# EAGLE board CT_schematic (EAGLE 7.6.0)

Size 100 x 80 mm. Coordinates in mm from the lower left corner, seen from the top.
Outline: 0,0 100,0 100,80 0,80 0,0
Copper layers (1*16): Top 0.035mm / dielectric 1.5mm / Bottom 0.035mm
Design rules "default": minimum track width 10mil, minimum drill 24mil, track to track 8mil, track to pad 8mil, pad to pad 8mil, via to via 8mil, smd to smd 8mil, copper to edge 40mil, drill to drill 8mil, minimum pad ring 10mil, minimum via ring 8mil, stop-mask expansion 4mil, vias tented up to drill 0mil, thermal gap 10mil

## Footprints (pad centres in the part's own frame; a part is rotated, then mirrored left to right if it is on the bottom)
C0603 = smd 0.8 x 0.8: 1 -0.762,0; 2 0.762,0
C0402 = smd 0.5 x 0.5: 1 -0.508,0; 2 0.508,0
C1210 = smd 1.2 x 2.5: 1 -1.524,0; 2 1.524,0
R0603 = smd 0.8 x 0.8: 1 -0.762,0; 2 0.762,0
EXV-9H = smd 3.505 x 1.676: 1 -2.857,0; 2 2.857,0
L0603 = smd 0.8 x 0.8: 1 -0.762,0; 2 0.762,0
IND25X25CZ = smd 2.489 x 3.429: 1 -2.718,0; 2 2.718,0
PJ-037B_PACKAGE = drill 3.7 square: 1 12,0 | drill 3.2 square: 2 6,0
LQFP64 = smd 0.3 x 1.2: 1 -3.75,-5.75; 2 -3.25,-5.75; 3 -2.75,-5.75; 4 -2.25,-5.75; 5 -1.75,-5.75; 6 -1.25,-5.75; 7 -0.75,-5.75; 8 -0.25,-5.75; 9 0.25,-5.75; 10 0.75,-5.75; 11 1.25,-5.75; 12 1.75,-5.75; 13 2.25,-5.75; 14 2.75,-5.75; 15 3.25,-5.75; 16 3.75,-5.75; 33 3.75,5.75; 34 3.25,5.75; 35 2.75,5.75; 36 2.25,5.75; 37 1.75,5.75; 38 1.25,5.75; 39 0.75,5.75; 40 0.25,5.75; 41 -0.25,5.75; 42 -0.75,5.75; 43 -1.25,5.75; 44 -1.75,5.75; 45 -2.25,5.75; 46 -2.75,5.75; 47 -3.25,5.75; 48 -3.75,5.75 | smd 1.2 x 0.3: 17 5.75,-3.75; 18 5.75,-3.25; 19 5.75,-2.75; 20 5.75,-2.25; 21 5.75,-1.75; 22 5.75,-1.25; 23 5.75,-0.75; 24 5.75,-0.25; 25 5.75,0.25; 26 5.75,0.75; 27 5.75,1.25; 28 5.75,1.75; 29 5.75,2.25; 30 5.75,2.75; 31 5.75,3.25; 32 5.75,3.75; 49 -5.75,3.75; 50 -5.75,3.25; 51 -5.75,2.75; 52 -5.75,2.25; 53 -5.75,1.75; 54 -5.75,1.25; 55 -5.75,0.75; 56 -5.75,0.25; 57 -5.75,-0.25; 58 -5.75,-0.75; 59 -5.75,-1.25; 60 -5.75,-1.75; 61 -5.75,-2.25; 62 -5.75,-2.75; 63 -5.75,-3.25; 64 -5.75,-3.75
SOIC-8 = smd 1.6 x 0.6: 1 -2.7,1.905 | smd 1.55 x 0.6: 2 -2.7,0.635; 3 -2.7,-0.635; 4 -2.7,-1.905; 5 2.7,-1.905; 6 2.7,-0.635; 7 2.7,0.635; 8 2.7,1.905
TST-110-05-T-D-RA = drill 1 pad 1.7 square: 1 0,0 | drill 1 pad 1.7: 2 0,2.54; 3 2.54,0; 4 2.54,2.54; 5 5.08,0; 6 5.08,2.54; 7 7.62,0; 8 7.62,2.54; 9 10.16,0; 10 10.16,2.54; 11 12.7,0; 12 12.7,2.54; 13 15.24,0; 14 15.24,2.54; 15 17.78,0; 16 17.78,2.54; 17 20.32,0; 18 20.32,2.54; 19 22.86,0; 20 22.86,2.54
RFM75-S = smd 0.85 x 1.6: 1 1.7,0.8; 2 2.97,0.8; 3 4.24,0.8; 4 5.51,0.8; 5 6.78,0.8; 6 8.05,0.8; 7 9.32,0.8; 8 10.59,0.8
ABS07-32.768KHZ-7-T = smd 1.1 x 2.4: 1 -2.5,0; 2 0,0
ASFL1 = smd 1.7 x 1.5: 1 -1.27,-1.1; 2 1.27,-1.1; 3 1.27,1.1; 4 -1.27,1.1
IR3899MTR1PBF = smd 0.25 x 0.75: 1 0,0; 2 0.5,0; 3 1,0; 4 1.5,0; 5 2,0; 6 2.5,0; 7 3,0 | smd 0.75 x 0.25: 8 3.425,0.78; 9 3.425,1.28; 10 3.425,1.78; 14 -0.425,1.78; 15 -0.425,1.28; 16 -0.425,0.78 | smd 0.3 x 1.95: 11 3.22,3.63 | smd 1.62 x 2.42: 12 1.786,3.8 | smd 1 x 1.95: 13 0.117,3.63 | smd 2.19 x 1.25: 17 1.51,1.26
SON-6 = smd 0.55 x 0.3: 1 -0.355,0.5 | smd 0.52 x 0.3: 2 -0.37,0; 3 -0.37,-0.5; 4 0.37,-0.5; 5 0.37,0; 6 0.37,0.5
SW_4-1437565-2 = smd 1.4 x 2.1: 1 -2.23,4.55; 2 -2.23,-4.55; 3 2.23,4.55; 4 2.23,-4.55
LGM67K-G1J2-24-Z = smd 0.8 x 1.4: A -2,0; C 0,0
NC7SZ125M5X = smd 1.3 x 0.7: 1 -1.3,0.95; 2 -1.3,0; 3 -1.3,-0.95; 4 1.3,-0.95; 5 1.3,0.95

## Placement (x,y rotation side)
C1  1e-06  [C0603]  -19.05,72.39 0 top  (outside the outline)
C2  1e-07  [C0603]  -22.86,72.39 0 top  (outside the outline)
C3  1e-07  [C0603]  -26.67,72.39 0 top  (outside the outline)
C4  1e-07  [C0603]  -30.48,72.39 0 top  (outside the outline)
C5  1e-07  [C0603]  -34.29,72.39 0 top  (outside the outline)
C6  1e-07  [C0603]  -38.1,72.39 0 top  (outside the outline)
C7  4.7e-06  [C0603]  -69.85,67.31 0 top  (outside the outline)
C8  1e-08  [C0603]  -41.91,72.39 0 top  (outside the outline)
C9  1e-06  [C0603]  -45.72,72.39 0 top  (outside the outline)
C10  1e-11  [C0402]  -19.05,77.47 0 top  (outside the outline)
C11  1e-11  [C0402]  -22.86,77.47 0 top  (outside the outline)
C12  1e-08  [C0402]  -26.67,77.47 0 top  (outside the outline)
C13  1e-07  [C0402]  -30.48,77.47 0 top  (outside the outline)
C14  1e-07  [C0402]  -34.29,77.47 0 top  (outside the outline)
C15  1e-07  [C0402]  -38.1,77.47 0 top  (outside the outline)
C16  1e-06  [C0603]  -49.53,72.39 0 top  (outside the outline)
C17  1e-08  [C0402]  -41.91,77.47 0 top  (outside the outline)
C18  0.0001  [C1210]  -29.21,55.88 0 top  (outside the outline)
C19  2.2e-06  [C0603]  -15.24,72.39 0 top  (outside the outline)
C20  1e-07  [C0402]  -45.72,77.47 0 top  (outside the outline)
C21  1e-07  [C0402]  -49.53,77.47 0 top  (outside the outline)
C22  8.6971073877236e-09  [R0603]  -52.07,54.61 0 top  (outside the outline)
C23  2.9649229730876e-07  [R0603]  -62.23,54.61 0 top  (outside the outline)
C26  1e-07  [C0402]  -53.34,77.47 0 top  (outside the outline)
C27  0.0001  [EXV-9H]  -17.78,48.26 0 top  (outside the outline)
C28  0.0001  [EXV-9H]  -29.21,48.26 0 top  (outside the outline)
C29  1e-08  [C0402]  -57.15,77.47 0 top  (outside the outline)
C30  1e-08  [C0402]  -60.96,77.47 0 top  (outside the outline)
F1  240.0  [L0603]  -53.34,72.39 0 top  (outside the outline)
I1  6.8e-07  [IND25X25CZ]  -39.37,48.26 0 top  (outside the outline)
J1  PJ-037B  [PJ-037B_PACKAGE]  -43.18,7.62 0 top  (outside the outline)
R2  1000.0  [R0603]  -57.15,72.39 0 top  (outside the outline)
R4  4700.0  [R0603]  -60.96,72.39 0 top  (outside the outline)
R5  10000.0  [R0603]  -49.53,62.23 0 top  (outside the outline)
R6  10000.0  [R0603]  -54.61,62.23 0 top  (outside the outline)
R7  10000.0  [R0603]  -59.69,62.23 0 top  (outside the outline)
R8  10000.0  [R0603]  -64.77,62.23 0 top  (outside the outline)
R9  10000.0  [R0603]  -69.85,62.23 0 top  (outside the outline)
R10  10000.0  [R0603]  -15.24,67.31 0 top  (outside the outline)
R11  10000.0  [R0603]  -20.32,67.31 0 top  (outside the outline)
R12  10000.0  [R0603]  -25.4,67.31 0 top  (outside the outline)
R13  10000.0  [R0603]  -30.48,67.31 0 top  (outside the outline)
R14  10000.0  [R0603]  -35.56,67.31 0 top  (outside the outline)
R15  10000.0  [R0603]  -40.64,67.31 0 top  (outside the outline)
R16  10000.0  [R0603]  -45.72,67.31 0 top  (outside the outline)
R17  0.1  [R0603]  -64.77,72.39 0 top  (outside the outline)
R18  4030.2416170974  [R0603]  -69.85,54.61 0 top  (outside the outline)
R19  719.68600305311  [R0603]  -19.05,62.23 0 top  (outside the outline)
R20  58.613333333333  [R0603]  -26.67,62.23 0 top  (outside the outline)
R21  130.0  [R0603]  -68.58,72.39 0 top  (outside the outline)
R22  39000.0  [R0603]  -50.8,67.31 0 top  (outside the outline)
R23  49900.0  [R0603]  -55.88,67.31 0 top  (outside the outline)
R24  5147.5789473684  [R0603]  -34.29,62.23 0 top  (outside the outline)
R25  10000.0  [R0603]  -60.96,67.31 0 top  (outside the outline)
R26  10000.0  [R0603]  -66.04,67.31 0 top  (outside the outline)
R27  9100.0  [R0603]  -15.24,77.47 0 top  (outside the outline)
R28  680000.0  [R0603]  -39.37,62.23 0 top  (outside the outline)
R29  120000.0  [R0603]  -44.45,62.23 0 top  (outside the outline)
U1  stm32f103rft7  [LQFP64]  -53.34,7.62 0 top  (outside the outline)
U2  AT25M02-SSHD-T  [SOIC-8]  -58.42,27.94 0 top  (outside the outline)
U3  TST-110-05-T-D-RA  [TST-110-05-T-D-RA]  -64.77,36.83 0 top  (outside the outline)
U4  RFM75-S  [RFM75-S]  -26.67,3.81 0 top  (outside the outline)
U5  ABS07-32.768KHZ-7-T  [ABS07-32.768KHZ-7-T]  -58.42,48.26 0 top  (outside the outline)
U6  ASFL1-25MHZ-NCS  [ASFL1]  -26.67,39.37 0 top  (outside the outline)
U7  IR3899MTR1PBF  [IR3899MTR1PBF]  -44.45,26.67 0 top  (outside the outline)
U8  TPS3895ADRYR  [SON-6]  -63.5,76.2 0 top  (outside the outline)
U9  4-1437565-2  [SW_4-1437565-2]  -27.94,29.21 0 top  (outside the outline)
U10  Q65110A2395  [LGM67K-G1J2-24-Z]  -17.78,55.88 0 top  (outside the outline)
U11  nc7sz125m5x  [NC7SZ125M5X]  -34.29,54.61 0 top  (outside the outline)
U12  nc7sz125m5x  [NC7SZ125M5X]  -40.64,54.61 0 top  (outside the outline)

## Library data of the parts
C1-C23 C26-C30 F1 I1 J1 R2 R4-R29 U1-U12 = circuit_tree

## Nets
CLK_CRYSTAL_U1_3: C10.1 U1.3 U5.1
CLK_CRYSTAL_U1_4: C11.1 U1.4 U5.2
CLK_U1_5: U1.5 U6.3
GND: C1.2 C2.2 C3.2 C4.2 C5.2 C6.2 C7.2 C8.2 C9.2 C10.2 C11.2 C12.2 C13.2 C14.2 C15.2 C16.2 C17.2 C19.2 C20.2 C21.2 C26.2 C27.2 C28.2 C29.2 C30.2 J1.2 R2.2 R5.2 R14.2 R17.1 R17.2 R19.2 R22.2 R24.2 R27.2 R29.2 U1.12 U1.18 U1.31 U1.47 U1.63 U2.4 U3.4 U3.6 U3.8 U3.10 U3.12 U3.14 U3.16 U3.18 U3.20 U4.1 U6.2 U7.4 U7.11 U7.17 U8.2 U10.C U11.2 U11.3 U12.1 U12.3
NET_U1_7: R4.1 U1.7 U12.4
NET_U1_13: C8.1 C9.1 F1.1 U1.13
NET_U1_60: R5.1 U1.60
NET_U1_61: U10.A
NET_U1_62: U9.3 U9.4
NET_U2_3: R6.1 U2.3
NET_U2_7: R8.1 U2.7
NET_U3_3: R9.1 U3.3
NET_U3_7: R11.1 U3.7
NET_U3_9: R12.1 U3.9
NET_U3_19: R14.1 U3.19
NET_U4_3: R15.1 U4.3
NET_U7_1: C22.1 R18.1 R19.1 R20.1 R21.1 U7.1 U7.8
NET_U7_2: C21.1 U7.2
NET_U7_3: C22.2 C23.1 C23.2 U7.3
NET_U7_5: R22.1 U7.5
NET_U7_10: C19.1 U7.10
NET_U7_12: C18.1 I1.1 U7.12
NET_U7_13: U7.13
NET_U7_14: C18.2 U7.14
NET_U7_15: R23.1 R24.1 U7.15
NET_U7_ATNET_3: I1.2 R18.2
NET_U7_ATNET_4: C23.2 R20.2
NET_U7_ATNET_5: R21.2
NET_U8_1: R26.1 R27.1 U8.1
NET_U8_3: R28.2 R29.1 U8.3
NET_U8_4: R25.1 U8.4 U11.4 U12.2
NET_U9_1: R2.1 U9.1 U9.2
PROC_SPI1_MISO: U1.22 U4.7
PROC_SPI1_MOSI: U1.23 U4.6
PROC_SPI1_NSS: R16.1 U1.20 U4.4
PROC_SPI1_SCK: U1.21 U4.5
PROC_SPI2_MISO: U1.35 U2.2
PROC_SPI2_MOSI: U1.36 U2.5
PROC_SPI2_NSS: R7.1 U1.33 U2.1
PROC_SPI2_SCK: U1.34 U2.6
PROC_SYS_JTDI: R10.1 U1.50 U3.5
PROC_SYS_JTDO_TRACESWO: U1.55 U3.13
RST_OUT_U3_SRESET_B: R13.1 U3.15 U11.1
VCC_S1_16V8: C20.1 C27.1 C28.1 J1.1 R23.2 U7.9
VCC_TIER1_3V3: C1.1 C2.1 C3.1 C4.1 C5.1 C6.1 C7.1 C12.1 C13.1 C14.1 C15.1 C16.1 C17.1 C26.1 C29.1 C30.1 F1.2 I1.2 R4.2 R6.2 R7.2 R8.2 R9.2 R10.2 R11.2 R12.2 R13.2 R15.2 R16.2 R18.2 R25.2 R26.2 R28.1 U1.1 U1.19 U1.32 U1.48 U1.64 U2.8 U3.1 U3.2 U4.2 U6.4 U8.6 U11.5 U12.5

## Tracks (layer width: path | path; a pad name or v marks a point on that pad's centre or on a via)
CLK_CRYSTAL_U1_3  (2 unrouted)
CLK_CRYSTAL_U1_4  (2 unrouted)
CLK_U1_5  (1 unrouted)
GND  (61 unrouted)
NET_U1_7  (2 unrouted)
NET_U1_13  (3 unrouted)
NET_U1_60  (1 unrouted)
NET_U1_62  (1 unrouted)
NET_U2_3  (1 unrouted)
NET_U2_7  (1 unrouted)
NET_U3_3  (1 unrouted)
NET_U3_7  (1 unrouted)
NET_U3_9  (1 unrouted)
NET_U3_19  (1 unrouted)
NET_U4_3  (1 unrouted)
NET_U7_1  (6 unrouted)
NET_U7_2  (1 unrouted)
NET_U7_3  (3 unrouted)
NET_U7_5  (1 unrouted)
NET_U7_10  (1 unrouted)
NET_U7_12  (2 unrouted)
NET_U7_14  (1 unrouted)
NET_U7_15  (2 unrouted)
NET_U7_ATNET_3  (1 unrouted)
NET_U7_ATNET_4  (1 unrouted)
NET_U8_1  (2 unrouted)
NET_U8_3  (2 unrouted)
NET_U8_4  (3 unrouted)
NET_U9_1  (2 unrouted)
PROC_SPI1_MISO  (1 unrouted)
PROC_SPI1_MOSI  (1 unrouted)
PROC_SPI1_NSS  (2 unrouted)
PROC_SPI1_SCK  (1 unrouted)
PROC_SPI2_MISO  (1 unrouted)
PROC_SPI2_MOSI  (1 unrouted)
PROC_SPI2_NSS  (2 unrouted)
PROC_SPI2_SCK  (1 unrouted)
PROC_SYS_JTDI  (2 unrouted)
PROC_SYS_JTDO_TRACESWO  (1 unrouted)
RST_OUT_U3_SRESET_B  (2 unrouted)
VCC_S1_16V8  (5 unrouted)
VCC_TIER1_3V3  (45 unrouted)